# EAGLE board Sound_JQ6500_4_X9 (EAGLE 9.5.2), part 1 of 2
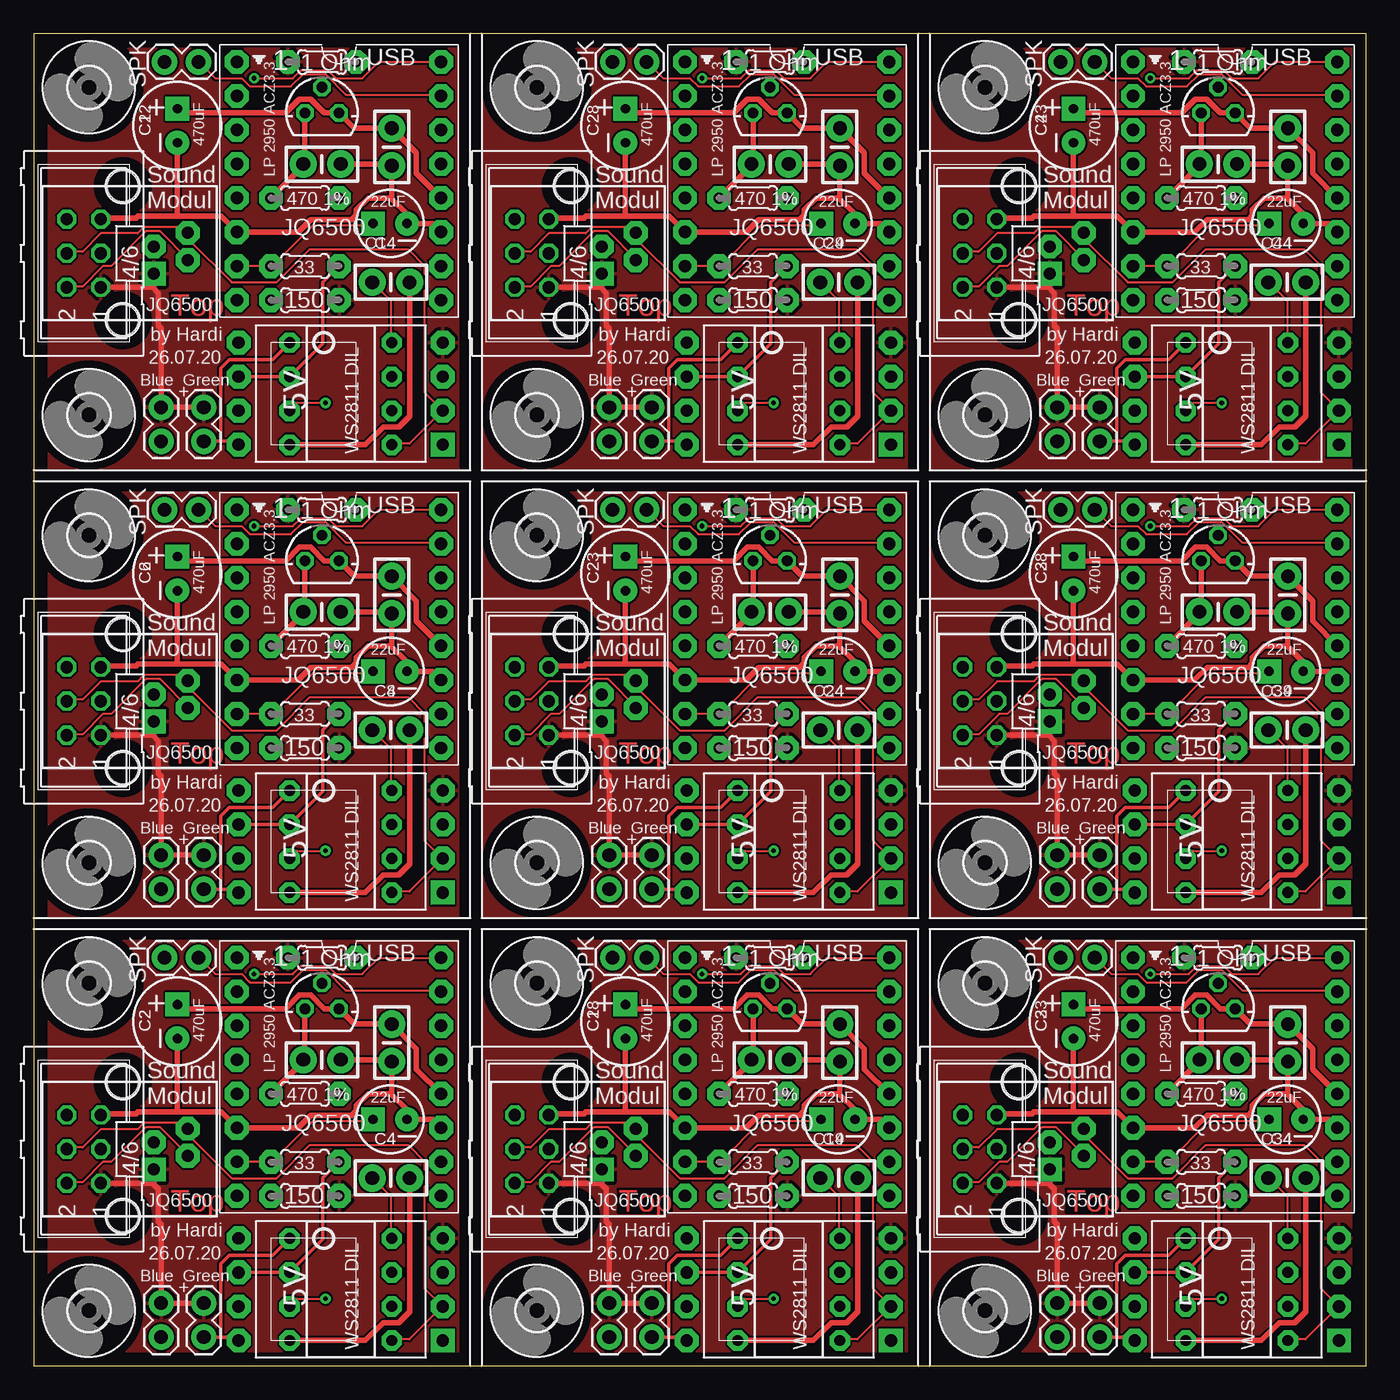
[diagram p0: board, top side]
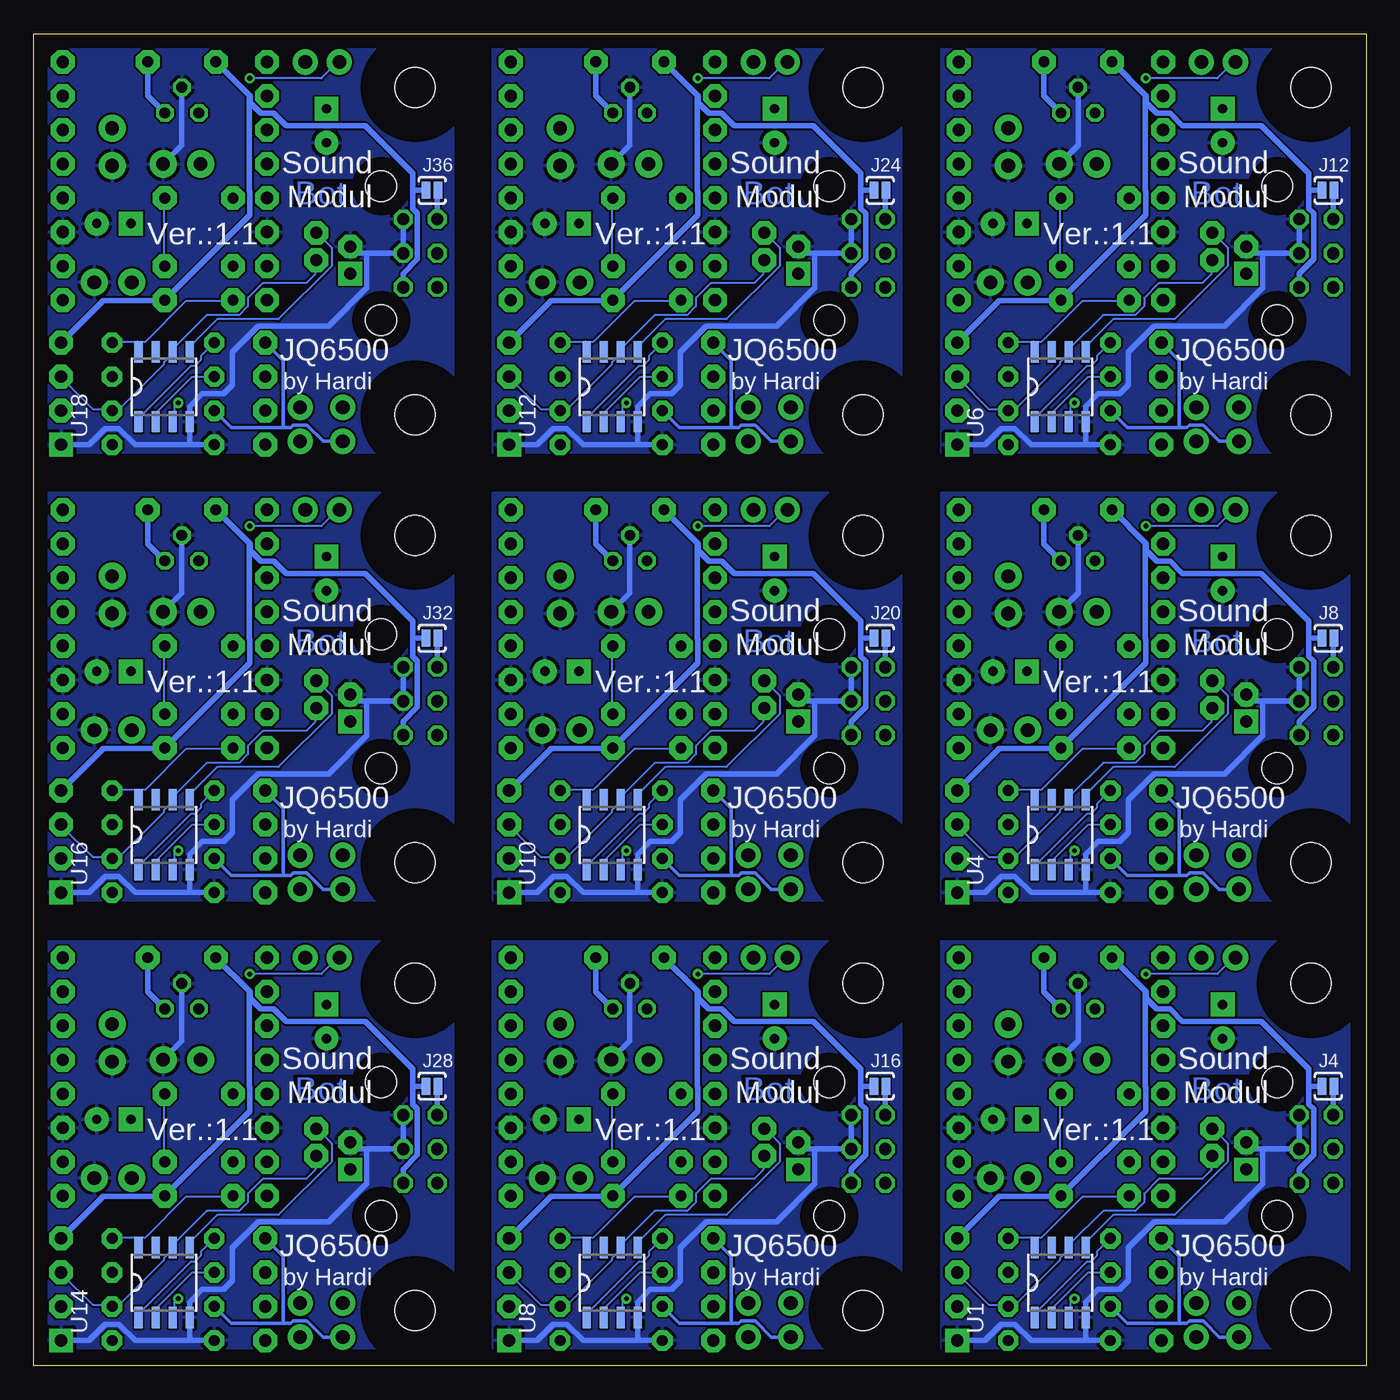
[diagram p1: board, bottom side, seen from below]

Size 99.47 x 99.47 mm. Coordinates in mm from the lower left corner, seen from the top.
Outline: 0,0 99.47,0
Outline: 0,32.6 0,0
Outline: 0,66.03 0,33.43
Outline: 99.47,99.47 0,99.47 0,0
Outline: 33.43,0 66.03,0
Outline: 66.03,99.47 33.43,99.47
Outline: 66.87,0 99.47,0
Outline: 99.47,0 99.47,32.6
Outline: 99.47,33.43 99.47,66.03
Outline: 99.47,0 99.47,99.47
Outline: 99.47,99.47 66.87,99.47
Copper layers (1*16): Top 0.035mm / dielectric 1.5mm / Bottom 0.035mm
Design rules "default": minimum track width 6mil, minimum drill 0.35mm, track to track 6mil, track to pad 6mil, pad to pad 6mil, via to via 6mil, smd to smd 6mil, copper to edge 40mil, drill to drill 6mil, minimum pad ring 10mil, minimum via ring 8mil, stop-mask expansion 4mil, vias tented up to drill 0mil, thermal gap 10mil

## Footprints (pad centres in the part's own frame; a part is rotated, then mirrored left to right if it is on the bottom)
CAP-PTH-SMALL-KIT = drill 1.016 pad 2.032: 1 -1.397,0; 2 1.397,0
SPARKFUN-CAPACITORS_CPOL-RADIAL-100UF-25V = drill 0.7 pad 1.778 square: 1 1.27,0 | drill 0.7 pad 1.778: 2 -1.27,0
CAPACITOR_CPOL-RADIAL-22UF = drill 0.7 pad 1.778 square: 1 1.27,0 | drill 0.7 pad 1.778: 2 -1.27,0
3,0 = hole 3: 0,0
78LXX = drill 0.813 octagon: GND 0,1.905; IN 1.27,0; OUT -1.27,0
1X02 = drill 1.016 pad 1.88: 1 0,0; 2 2.54,0
SJ_2S-NO = smd 0.635 x 1.27: 1 -0.45,0; 2 0.45,0
JQ6500 = drill 0.914 pad 1.778 octagon: 1 -8.89,16.51; 2 -8.89,13.97; 3 -8.89,11.43; 4 -8.89,8.89; 5 -8.89,6.35; 6 -8.89,3.81; 7 -8.89,1.27; 8 -8.89,-1.27; 9 6.35,-1.27; 10 6.35,1.27; 11 6.35,3.81; 12 6.35,6.35; 13 6.35,8.89; 14 6.35,11.43; 15 6.35,13.97; 16 6.35,16.51
RCL_0204/5 = drill 0.813 pad 1.778 octagon: 1 -2.54,0; 2 2.54,0
S3PO_MODUL_WS2811_SOUND_MP3-TF-16P_WS2811_AND_ATTINY_PUSHBUTTONACTION_4017_2_WS2811_WS2811_5V = drill 0.914 pad 1.778 square: 1 -5.08,-5.08 | drill 0.914 pad 1.778 octagon: 2 -2.54,-5.08; 3 0,-5.08; 4 2.54,-5.08; 5 2.54,10.16; 6 0,10.16; 7 -2.54,10.16; 8 -5.08,10.16
ML6 = drill 0.914 octagon: 1 -2.54,-1.27; 2 -2.54,1.27; 3 0,-1.27; 4 0,1.27; 5 2.54,-1.27; 6 2.54,1.27
SOP8 = smd 0.6 x 1.6: 1 -1.905,-2.6; 2 -0.635,-2.6; 3 0.635,-2.6; 4 1.905,-2.6; 5 1.905,2.6; 6 0.635,2.6; 7 -0.635,2.6; 8 -1.905,2.6
S3PO_MODUL_WS2811_SOUND_MP3-TF-16P_WS2811_AND_ATTINY_WS2811_DIP08 = drill 0.813 pad 1.524 octagon: 1 -3.81,-3.81; 2 -1.27,-3.81; 3 1.27,-3.81; 4 3.81,-3.81; 5 3.81,3.81; 6 1.27,3.81; 7 -1.27,3.81; 8 -3.81,3.81
RJ10 = drill 0.9 pad 1.778 square: 1 -1.524,-2.3 | drill 0.9 pad 1.778 octagon: 2 -0.508,-4.84; 3 0.508,-2.3; 4 1.524,-4.84 | hole 2.3: 5,0; -5,0

## Placement (x,y rotation side)
C1  0.1uF  [CAP-PTH-SMALL-KIT]  26.73,24.13 270 top
C2  470uF  [SPARKFUN-CAPACITORS_CPOL-RADIAL-100UF-25V]  10.73,25.72 90 top
C3  0.1uF  [CAP-PTH-SMALL-KIT]  26.73,57.56 270 top
C4  22uF  [CAPACITOR_CPOL-RADIAL-22UF]  26.61,18.42 180 top
C5  0.1uF  [CAP-PTH-SMALL-KIT]  26.67,47.47 0 top
C6  470uF  [SPARKFUN-CAPACITORS_CPOL-RADIAL-100UF-25V]  10.73,59.15 90 top
C7  0.1uF  [CAP-PTH-SMALL-KIT]  21.53,22.86 0 top
C8  22uF  [CAPACITOR_CPOL-RADIAL-22UF]  26.61,51.85 180 top
C9  0.1uF  [CAP-PTH-SMALL-KIT]  21.53,56.29 0 top
C10  0.1uF  [CAP-PTH-SMALL-KIT]  26.73,91 270 top
C11  0.1uF  [CAP-PTH-SMALL-KIT]  26.67,80.9 0 top
C12  470uF  [SPARKFUN-CAPACITORS_CPOL-RADIAL-100UF-25V]  10.73,92.58 90 top
C13  0.1uF  [CAP-PTH-SMALL-KIT]  26.67,14.03 0 top
C14  22uF  [CAPACITOR_CPOL-RADIAL-22UF]  26.61,85.28 180 top
C15  0.1uF  [CAP-PTH-SMALL-KIT]  21.53,89.73 0 top
C16  0.1uF  [CAP-PTH-SMALL-KIT]  60.17,24.13 270 top
C17  0.1uF  [CAP-PTH-SMALL-KIT]  60.1,14.03 0 top
C18  470uF  [SPARKFUN-CAPACITORS_CPOL-RADIAL-100UF-25V]  44.17,25.72 90 top
C19  22uF  [CAPACITOR_CPOL-RADIAL-22UF]  60.04,18.42 180 top
C20  0.1uF  [CAP-PTH-SMALL-KIT]  54.96,22.86 0 top
C21  0.1uF  [CAP-PTH-SMALL-KIT]  60.17,57.56 270 top
C22  0.1uF  [CAP-PTH-SMALL-KIT]  60.1,47.47 0 top
C23  470uF  [SPARKFUN-CAPACITORS_CPOL-RADIAL-100UF-25V]  44.17,59.15 90 top
C24  22uF  [CAPACITOR_CPOL-RADIAL-22UF]  60.04,51.85 180 top
C25  0.1uF  [CAP-PTH-SMALL-KIT]  54.96,56.29 0 top
C26  0.1uF  [CAP-PTH-SMALL-KIT]  60.17,91 270 top
C27  0.1uF  [CAP-PTH-SMALL-KIT]  60.1,80.9 0 top
C28  470uF  [SPARKFUN-CAPACITORS_CPOL-RADIAL-100UF-25V]  44.17,92.58 90 top
C29  22uF  [CAPACITOR_CPOL-RADIAL-22UF]  60.04,85.28 180 top
C30  0.1uF  [CAP-PTH-SMALL-KIT]  54.96,89.73 0 top
C31  0.1uF  [CAP-PTH-SMALL-KIT]  93.6,24.13 270 top
C32  0.1uF  [CAP-PTH-SMALL-KIT]  93.54,14.03 0 top
C33  470uF  [SPARKFUN-CAPACITORS_CPOL-RADIAL-100UF-25V]  77.6,25.72 90 top
C34  22uF  [CAPACITOR_CPOL-RADIAL-22UF]  93.47,18.42 180 top
C35  0.1uF  [CAP-PTH-SMALL-KIT]  88.39,22.86 0 top
C36  0.1uF  [CAP-PTH-SMALL-KIT]  93.6,57.56 270 top
C37  0.1uF  [CAP-PTH-SMALL-KIT]  93.54,47.47 0 top
C38  470uF  [SPARKFUN-CAPACITORS_CPOL-RADIAL-100UF-25V]  77.6,59.15 90 top
C39  22uF  [CAPACITOR_CPOL-RADIAL-22UF]  93.47,51.85 180 top
C40  0.1uF  [CAP-PTH-SMALL-KIT]  88.39,56.29 0 top
C41  0.1uF  [CAP-PTH-SMALL-KIT]  93.6,91 270 top
C42  0.1uF  [CAP-PTH-SMALL-KIT]  93.54,80.9 0 top
C43  470uF  [SPARKFUN-CAPACITORS_CPOL-RADIAL-100UF-25V]  77.6,92.58 90 top
C44  22uF  [CAPACITOR_CPOL-RADIAL-22UF]  93.47,85.28 180 top
C45  0.1uF  [CAP-PTH-SMALL-KIT]  88.39,89.73 0 top
H1  MOUNT-HOLE3.0  [3,0]  4.13,4.13 0 top
H2  MOUNT-HOLE3.0  [3,0]  4.13,62.01 0 top
H3  MOUNT-HOLE3.0  [3,0]  4.13,28.57 0 top
H4  MOUNT-HOLE3.0  [3,0]  4.13,37.56 0 top
H5  MOUNT-HOLE3.0  [3,0]  4.13,95.44 0 top
H6  MOUNT-HOLE3.0  [3,0]  4.13,70.99 0 top
H7  MOUNT-HOLE3.0  [3,0]  37.56,28.57 0 top
H8  MOUNT-HOLE3.0  [3,0]  37.56,4.13 0 top
H9  MOUNT-HOLE3.0  [3,0]  37.56,62.01 0 top
H10  MOUNT-HOLE3.0  [3,0]  37.56,37.56 0 top
H11  MOUNT-HOLE3.0  [3,0]  37.56,95.44 0 top
H12  MOUNT-HOLE3.0  [3,0]  37.56,70.99 0 top
H13  MOUNT-HOLE3.0  [3,0]  70.99,28.57 0 top
H14  MOUNT-HOLE3.0  [3,0]  70.99,4.13 0 top
H15  MOUNT-HOLE3.0  [3,0]  70.99,62.01 0 top
H16  MOUNT-HOLE3.0  [3,0]  70.99,37.56 0 top
H17  MOUNT-HOLE3.0  [3,0]  70.99,95.44 0 top
H18  MOUNT-HOLE3.0  [3,0]  70.99,70.99 0 top
IC1  LP 2950 ACZ3.3  [78LXX]  21.53,26.67 0 top
IC2  LP 2950 ACZ3.3  [78LXX]  21.53,60.1 0 top
IC3  LP 2950 ACZ3.3  [78LXX]  21.53,93.54 0 top
IC4  LP 2950 ACZ3.3  [78LXX]  54.96,26.67 0 top
IC5  LP 2950 ACZ3.3  [78LXX]  54.96,60.1 0 top
IC6  LP 2950 ACZ3.3  [78LXX]  54.96,93.54 0 top
IC7  LP 2950 ACZ3.3  [78LXX]  88.39,26.67 0 top
IC8  LP 2950 ACZ3.3  [78LXX]  88.39,60.1 0 top
IC9  LP 2950 ACZ3.3  [78LXX]  88.39,93.54 0 top
J1  SPK  [1X02]  12.32,30.48 180 top
J2  Green  [1X02]  12.7,4.7 270 top
J3  Blue  [1X02]  9.53,4.7 270 top
J4  SOLDERJUMPERNO  [SJ_2S-NO]  2.86,20.89 0 bottom
J5  SPK  [1X02]  12.32,63.91 180 top
J6  Green  [1X02]  12.7,38.13 270 top
J7  Blue  [1X02]  9.53,38.13 270 top
J8  SOLDERJUMPERNO  [SJ_2S-NO]  2.86,54.33 0 bottom
J9  SPK  [1X02]  12.32,97.35 180 top
J10  Green  [1X02]  12.7,71.57 270 top
J11  Blue  [1X02]  9.53,71.57 270 top
J12  SOLDERJUMPERNO  [SJ_2S-NO]  2.86,87.76 0 bottom
J13  SPK  [1X02]  45.75,30.48 180 top
J14  Green  [1X02]  46.13,4.7 270 top
J15  Blue  [1X02]  42.96,4.7 270 top
J16  SOLDERJUMPERNO  [SJ_2S-NO]  36.29,20.89 0 bottom
J17  SPK  [1X02]  45.75,63.91 180 top
J18  Green  [1X02]  46.13,38.13 270 top
J19  Blue  [1X02]  42.96,38.13 270 top
J20  SOLDERJUMPERNO  [SJ_2S-NO]  36.29,54.33 0 bottom
J21  SPK  [1X02]  45.75,97.35 180 top
J22  Green  [1X02]  46.13,71.57 270 top
J23  Blue  [1X02]  42.96,71.57 270 top
J24  SOLDERJUMPERNO  [SJ_2S-NO]  36.29,87.76 0 bottom
J25  SPK  [1X02]  79.19,30.48 180 top
J26  Green  [1X02]  79.57,4.7 270 top
J27  Blue  [1X02]  76.39,4.7 270 top
J28  SOLDERJUMPERNO  [SJ_2S-NO]  69.72,20.89 0 bottom
J29  SPK  [1X02]  79.19,63.91 180 top
J30  Green  [1X02]  79.57,38.13 270 top
J31  Blue  [1X02]  76.39,38.13 270 top
J32  SOLDERJUMPERNO  [SJ_2S-NO]  69.72,54.33 0 bottom
J33  SPK  [1X02]  79.19,97.35 180 top
J34  Green  [1X02]  79.57,71.57 270 top
J35  Blue  [1X02]  76.39,71.57 270 top
J36  SOLDERJUMPERNO  [SJ_2S-NO]  69.72,87.76 0 bottom
MOD1  [JQ6500]  24.07,13.97 0 top
MOD2  [JQ6500]  24.07,47.4 0 top
MOD3  [JQ6500]  24.07,80.84 0 top
MOD4  [JQ6500]  57.5,13.97 0 top
MOD5  [JQ6500]  57.5,47.4 0 top
MOD6  [JQ6500]  57.5,80.84 0 top
MOD7  [JQ6500]  90.93,13.97 0 top
MOD8  [JQ6500]  90.93,47.4 0 top
MOD9  [JQ6500]  90.93,80.84 0 top
R1  1 Ohm  [RCL_0204/5]  21.53,30.48 0 top
R2  150  [RCL_0204/5]  20.26,12.7 180 top
R3  470 1%  [RCL_0204/5]  20.26,20.32 0 top
R4  33  [RCL_0204/5]  20.26,15.24 180 top
R5  1 Ohm  [RCL_0204/5]  21.53,63.91 0 top
R6  150  [RCL_0204/5]  20.26,46.13 180 top
R7  470 1%  [RCL_0204/5]  20.26,53.75 0 top
R8  33  [RCL_0204/5]  20.26,48.67 180 top
R9  1 Ohm  [RCL_0204/5]  21.53,97.35 0 top
R10  150  [RCL_0204/5]  20.26,79.57 180 top
R11  470 1%  [RCL_0204/5]  20.26,87.19 0 top
R12  33  [RCL_0204/5]  20.26,82.11 180 top
R13  1 Ohm  [RCL_0204/5]  54.96,30.48 0 top
R14  150  [RCL_0204/5]  53.69,12.7 180 top
R15  470 1%  [RCL_0204/5]  53.69,20.32 0 top
R16  33  [RCL_0204/5]  53.69,15.24 180 top
R17  1 Ohm  [RCL_0204/5]  54.96,63.91 0 top
R18  150  [RCL_0204/5]  53.69,46.13 180 top
R19  470 1%  [RCL_0204/5]  53.69,53.75 0 top
R20  33  [RCL_0204/5]  53.69,48.67 180 top
R21  1 Ohm  [RCL_0204/5]  54.96,97.35 0 top
R22  150  [RCL_0204/5]  53.69,79.57 180 top
R23  470 1%  [RCL_0204/5]  53.69,87.19 0 top
R24  33  [RCL_0204/5]  53.69,82.11 180 top
R25  1 Ohm  [RCL_0204/5]  88.39,30.48 0 top
R26  150  [RCL_0204/5]  87.12,12.7 180 top
R27  470 1%  [RCL_0204/5]  87.12,20.32 0 top
R28  33  [RCL_0204/5]  87.12,15.24 180 top
R29  1 Ohm  [RCL_0204/5]  88.39,63.91 0 top
R30  150  [RCL_0204/5]  87.12,46.13 180 top
R31  470 1%  [RCL_0204/5]  87.12,53.75 0 top
R32  33  [RCL_0204/5]  87.12,48.67 180 top
R33  1 Ohm  [RCL_0204/5]  88.39,97.35 0 top
R34  150  [RCL_0204/5]  87.12,79.57 180 top
R35  470 1%  [RCL_0204/5]  87.12,87.19 0 top
R36  33  [RCL_0204/5]  87.12,82.11 180 top
SV1  [S3PO_MODUL_WS2811_SOUND_MP3-TF-16P_WS2811_AND_ATTINY_PUSHBUTTONACTION_4017_2_WS2811_WS2811_5V]  25.46,6.99 90 top
SV2  [ML6]  3.75,16.19 90 top
SV3  [S3PO_MODUL_WS2811_SOUND_MP3-TF-16P_WS2811_AND_ATTINY_PUSHBUTTONACTION_4017_2_WS2811_WS2811_5V]  25.46,40.42 90 top
SV4  [ML6]  3.75,49.63 90 top
SV5  [S3PO_MODUL_WS2811_SOUND_MP3-TF-16P_WS2811_AND_ATTINY_PUSHBUTTONACTION_4017_2_WS2811_WS2811_5V]  25.46,73.85 90 top
SV6  [ML6]  3.75,83.06 90 top
SV7  [S3PO_MODUL_WS2811_SOUND_MP3-TF-16P_WS2811_AND_ATTINY_PUSHBUTTONACTION_4017_2_WS2811_WS2811_5V]  58.9,6.99 90 top
SV8  [ML6]  37.18,16.19 90 top
SV9  [S3PO_MODUL_WS2811_SOUND_MP3-TF-16P_WS2811_AND_ATTINY_PUSHBUTTONACTION_4017_2_WS2811_WS2811_5V]  58.9,40.42 90 top
SV10  [ML6]  37.18,49.63 90 top
SV11  [S3PO_MODUL_WS2811_SOUND_MP3-TF-16P_WS2811_AND_ATTINY_PUSHBUTTONACTION_4017_2_WS2811_WS2811_5V]  58.9,73.85 90 top
SV12  [ML6]  37.18,83.06 90 top
SV13  [S3PO_MODUL_WS2811_SOUND_MP3-TF-16P_WS2811_AND_ATTINY_PUSHBUTTONACTION_4017_2_WS2811_WS2811_5V]  92.33,6.99 90 top
SV14  [ML6]  70.61,16.19 90 top
SV15  [S3PO_MODUL_WS2811_SOUND_MP3-TF-16P_WS2811_AND_ATTINY_PUSHBUTTONACTION_4017_2_WS2811_WS2811_5V]  92.33,40.42 90 top
SV16  [ML6]  70.61,49.63 90 top
SV17  [S3PO_MODUL_WS2811_SOUND_MP3-TF-16P_WS2811_AND_ATTINY_PUSHBUTTONACTION_4017_2_WS2811_WS2811_5V]  92.33,73.85 90 top
SV18  [ML6]  70.61,83.06 90 top
U1  WS2811 DIL  [SOP8]  22.86,6.23 0 bottom
U2  WS2811 DIL  [S3PO_MODUL_WS2811_SOUND_MP3-TF-16P_WS2811_AND_ATTINY_WS2811_DIP08]  22.92,5.71 270 top
U3  WS2811 DIL  [S3PO_MODUL_WS2811_SOUND_MP3-TF-16P_WS2811_AND_ATTINY_WS2811_DIP08]  22.92,39.15 270 top
U4  WS2811 DIL  [SOP8]  22.86,39.66 0 bottom
U5  WS2811 DIL  [S3PO_MODUL_WS2811_SOUND_MP3-TF-16P_WS2811_AND_ATTINY_WS2811_DIP08]  22.92,72.58 270 top
U6  WS2811 DIL  [SOP8]  22.86,73.1 0 bottom
U7  WS2811 DIL  [S3PO_MODUL_WS2811_SOUND_MP3-TF-16P_WS2811_AND_ATTINY_WS2811_DIP08]  56.36,5.71 270 top
U8  WS2811 DIL  [SOP8]  56.29,6.23 0 bottom
U9  WS2811 DIL  [S3PO_MODUL_WS2811_SOUND_MP3-TF-16P_WS2811_AND_ATTINY_WS2811_DIP08]  56.36,39.15 270 top
U10  WS2811 DIL  [SOP8]  56.29,39.66 0 bottom
U11  WS2811 DIL  [S3PO_MODUL_WS2811_SOUND_MP3-TF-16P_WS2811_AND_ATTINY_WS2811_DIP08]  56.36,72.58 270 top
U12  WS2811 DIL  [SOP8]  56.29,73.1 0 bottom
U13  WS2811 DIL  [S3PO_MODUL_WS2811_SOUND_MP3-TF-16P_WS2811_AND_ATTINY_WS2811_DIP08]  89.79,5.71 270 top
U14  WS2811 DIL  [SOP8]  89.73,6.23 0 bottom
U15  WS2811 DIL  [S3PO_MODUL_WS2811_SOUND_MP3-TF-16P_WS2811_AND_ATTINY_WS2811_DIP08]  89.79,39.15 270 top
U16  WS2811 DIL  [SOP8]  89.73,39.66 0 bottom
U17  WS2811 DIL  [S3PO_MODUL_WS2811_SOUND_MP3-TF-16P_WS2811_AND_ATTINY_WS2811_DIP08]  89.79,72.58 270 top
U18  WS2811 DIL  [SOP8]  89.73,73.1 0 bottom
X1  RJ10  [RJ10]  6.67,16.19 90 top
X2  RJ10  [RJ10]  6.67,49.63 90 top
X3  RJ10  [RJ10]  6.67,83.06 90 top
X4  RJ10  [RJ10]  40.1,16.19 90 top
X5  RJ10  [RJ10]  40.1,49.63 90 top
X6  RJ10  [RJ10]  40.1,83.06 90 top
X7  RJ10  [RJ10]  73.53,16.19 90 top
X8  RJ10  [RJ10]  73.53,49.63 90 top
X9  RJ10  [RJ10]  73.53,83.06 90 top

## Library data of the parts
C1 C3 C5 C7 C9-C11 C13 C15-C17 C20-C22 C25-C27 C30-C32 C35-C37 C40-C42 C45 = SparkFun-Capacitors; PROD_ID: CAP-08370
C2 C6 C12 C18 C23 C28 C33 C38 C43 = Sound_MP3-TF-16P_and_WS2811; PROD_ID: CAP-08439
C4 C8 C14 C19 C24 C29 C34 C39 C44 = Sound_MP3-TF-16P_WS2811_and_ATTiny; PROD_ID: CAP-08439
H1-H18 = holes
IC1-IC9 = v-reg-3
J1-J3 J5-J7 J9-J11 J13-J15 J17-J19 J21-J23 J25-J27 J29-J31 J33-J35 = SparkFun-Connectors
J4 J8 J12 J16 J20 J24 J28 J32 J36 = SparkFun-Retired
MOD1-MOD9 = Sound_JQ6500; OC_FARNELL: unknown; OC_NEWARK: unknown
R1-R36 = Sound_MP3-TF-16P_and_WS2811; SPICEPREFIX: R
SV1 SV3 SV5 SV7 SV9 SV11 SV13 SV15 SV17 U1 U4 U6 U8 U10 U12 U14 U16 U18 = S3PO_Modul_WS2811
SV2 SV4 SV6 SV8 SV10 SV12 SV14 SV16 SV18 = con-harting-ml; OC_FARNELL: unknown; OC_NEWARK: unknown
U2 U3 U5 U7 U9 U11 U13 U15 U17 = S3PO_Modul_WS2811; PROD_ID: IC-09439
X1-X9 = RJ10; OC_FARNELL: unknown; OC_NEWARK: unknown

## Nets
3V1: C9.1 IC2.OUT R7.1
3V2: C15.1 IC3.OUT R11.1
3V3: C7.1 IC1.OUT R3.1
3V4: C20.1 IC4.OUT R15.1
3V5: C25.1 IC5.OUT R19.1
3V6: C30.1 IC6.OUT R23.1
3V7: C35.1 IC7.OUT R27.1
3V8: C40.1 IC8.OUT R31.1
3V9: C45.1 IC9.OUT R35.1
+5V: J2.1 J3.1 J4.1 R1.1 R2.1 SV1.4 SV2.1 X1.1
+5V1: J6.1 J7.1 J8.1 R5.1 R6.1 SV3.4 SV4.1 X2.1
+5V2: J10.1 J11.1 J12.1 R9.1 R10.1 SV5.4 SV6.1 X3.1
+5V3: J14.1 J15.1 J16.1 R13.1 R14.1 SV7.4 SV8.1 X4.1
+5V4: J18.1 J19.1 J20.1 R17.1 R18.1 SV9.4 SV10.1 X5.1
+5V5: J22.1 J23.1 J24.1 R21.1 R22.1 SV11.4 SV12.1 X6.1
+5V6: J26.1 J27.1 J28.1 R25.1 R26.1 SV13.4 SV14.1 X7.1
+5V7: J30.1 J31.1 J32.1 R29.1 R30.1 SV15.4 SV16.1 X8.1
+5V8: J34.1 J35.1 J36.1 R33.1 R34.1 SV17.4 SV18.1 X9.1
B1: J7.2 SV3.5 U3.3 U4.3
B2: J3.2 SV1.5 U1.3 U2.3
B3: J11.2 SV5.5 U5.3 U6.3
B4: J15.2 SV7.5 U7.3 U8.3
B5: J19.2 SV9.5 U9.3 U10.3
B6: J23.2 SV11.5 U11.3 U12.3
B7: J27.2 SV13.5 U13.3 U14.3
B8: J31.2 SV15.5 U15.3 U16.3
B9: J35.2 SV17.5 U17.3 U18.3
DOUT: SV1.2 SV2.4 U1.5 U2.5 X1.4
DOUT1: SV3.2 SV4.4 U3.5 U4.5 X2.4
DOUT2: SV5.2 SV6.4 U5.5 U6.5 X3.4
DOUT3: SV7.2 SV8.4 U7.5 U8.5 X4.4
DOUT4: SV9.2 SV10.4 U9.5 U10.5 X5.4
DOUT5: SV11.2 SV12.4 U11.5 U12.5 X6.4
DOUT6: SV13.2 SV14.4 U13.5 U14.5 X7.4
DOUT7: SV15.2 SV16.4 U15.5 U16.5 X8.4
DOUT8: SV17.2 SV18.4 U17.5 U18.5 X9.4
G1: J6.2 SV3.8 U3.1 U4.1
G2: J2.2 SV1.8 U1.1 U2.1
G3: J10.2 SV5.8 U5.1 U6.1
G4: J14.2 SV7.8 U7.1 U8.1
G5: J18.2 SV9.8 U9.1 U10.1
G6: J22.2 SV11.8 U11.1 U12.1
G7: J26.2 SV13.8 U13.1 U14.1
G8: J30.2 SV15.8 U15.1 U16.1
G9: J34.2 SV17.8 U17.1 U18.1
GND: C1.2 C2.2 C4.2 C7.2 C13.2 IC1.GND MOD1.6 MOD1.11 SV1.1 SV2.3 SV2.5 U1.4 U2.4 X1.3
GND1: C3.2 C5.2 C6.2 C8.2 C9.2 IC2.GND MOD2.6 MOD2.11 SV3.1 SV4.3 SV4.5 U3.4 U4.4 X2.3
GND2: C10.2 C11.2 C12.2 C14.2 C15.2 IC3.GND MOD3.6 MOD3.11 SV5.1 SV6.3 SV6.5 U5.4 U6.4 X3.3
GND3: C16.2 C17.2 C18.2 C19.2 C20.2 IC4.GND MOD4.6 MOD4.11 SV7.1 SV8.3 SV8.5 U7.4 U8.4 X4.3
GND4: C21.2 C22.2 C23.2 C24.2 C25.2 IC5.GND MOD5.6 MOD5.11 SV9.1 SV10.3 SV10.5 U9.4 U10.4 X5.3
GND5: C26.2 C27.2 C28.2 C29.2 C30.2 IC6.GND MOD6.6 MOD6.11 SV11.1 SV12.3 SV12.5 U11.4 U12.4 X6.3
GND6: C31.2 C32.2 C33.2 C34.2 C35.2 IC7.GND MOD7.6 MOD7.11 SV13.1 SV14.3 SV14.5 U13.4 U14.4 X7.3
GND7: C36.2 C37.2 C38.2 C39.2 C40.2 IC8.GND MOD8.6 MOD8.11 SV15.1 SV16.3 SV16.5 U15.4 U16.4 X8.3
GND8: C41.2 C42.2 C43.2 C44.2 C45.2 IC9.GND MOD9.6 MOD9.11 SV17.1 SV18.3 SV18.5 U17.4 U18.4 X9.3
INPUT: SV1.3 SV2.2 U1.6 U2.6 X1.2
INPUT1: SV3.3 SV4.2 U3.6 U4.6 X2.2
INPUT2: SV5.3 SV6.2 U5.6 U6.6 X3.2
INPUT3: SV7.3 SV8.2 U7.6 U8.6 X4.2
INPUT4: SV9.3 SV10.2 U9.6 U10.6 X5.2
INPUT5: SV11.3 SV12.2 U11.6 U12.6 X6.2
INPUT6: SV13.3 SV14.2 U13.6 U14.6 X7.2
INPUT7: SV15.3 SV16.2 U15.6 U16.6 X8.2
INPUT8: SV17.3 SV18.2 U17.6 U18.6 X9.2
N$1: J1.1 MOD1.15
N$2: J1.2 MOD1.16
N$3: C1.1 C2.1 IC1.IN MOD1.12 R1.2
N$4: J4.2 SV2.6
N$5: C8.1 MOD2.7 R8.2
N$6: C3.1 C6.1 IC2.IN MOD2.12 R5.2
N$7: C4.1 MOD1.7 R4.2
N$8: J5.1 MOD2.15
N$9: J5.2 MOD2.16
N$10: J8.2 SV4.6
N$11: C14.1 MOD3.7 R12.2
N$12: C10.1 C12.1 IC3.IN MOD3.12 R9.2
N$13: J9.1 MOD3.15
N$14: J9.2 MOD3.16
N$15: J12.2 SV6.6
N$16: C19.1 MOD4.7 R16.2
N$17: C16.1 C18.1 IC4.IN MOD4.12 R13.2
N$18: J13.1 MOD4.15
N$19: J13.2 MOD4.16
N$20: J16.2 SV8.6
N$21: C24.1 MOD5.7 R20.2
N$22: C21.1 C23.1 IC5.IN MOD5.12 R17.2
N$23: J17.1 MOD5.15
N$24: J17.2 MOD5.16
N$25: J20.2 SV10.6
N$26: C29.1 MOD6.7 R24.2
N$27: C26.1 C28.1 IC6.IN MOD6.12 R21.2
N$28: J21.1 MOD6.15
N$29: J21.2 MOD6.16
N$30: J24.2 SV12.6
N$31: C34.1 MOD7.7 R28.2
N$32: C31.1 C33.1 IC7.IN MOD7.12 R25.2
N$33: J25.1 MOD7.15
N$34: J25.2 MOD7.16
N$35: J28.2 SV14.6
N$36: C39.1 MOD8.7 R32.2
N$37: C36.1 C38.1 IC8.IN MOD8.12 R29.2
N$38: J29.1 MOD8.15
N$39: J29.2 MOD8.16
N$40: J32.2 SV16.6
N$41: C44.1 MOD9.7 R36.2
N$42: C41.1 C43.1 IC9.IN MOD9.12 R33.2
N$43: J33.1 MOD9.15
N$44: J33.2 MOD9.16
N$45: J36.2 SV18.6
PWR1: C5.1 R6.2 U3.8 U4.8
PWR2: C13.1 R2.2 U1.8 U2.8
PWR3: C11.1 R10.2 U5.8 U6.8
PWR4: C17.1 R14.2 U7.8 U8.8
PWR5: C22.1 R18.2 U9.8 U10.8
PWR6: C27.1 R22.2 U11.8 U12.8
PWR7: C32.1 R26.2 U13.8 U14.8
PWR8: C37.1 R30.2 U15.8 U16.8
PWR9: C42.1 R34.2 U17.8 U18.8
R1: R3.2 R4.1 SV1.6 U1.2 U2.2
R2: R7.2 R8.1 SV3.6 U3.2 U4.2
R3: R11.2 R12.1 SV5.6 U5.2 U6.2
R4: R15.2 R16.1 SV7.6 U7.2 U8.2
R5: R19.2 R20.1 SV9.6 U9.2 U10.2
R6: R23.2 R24.1 SV11.6 U11.2 U12.2
R7: R27.2 R28.1 SV13.6 U13.2 U14.2
R8: R31.2 R32.1 SV15.6 U15.2 U16.2
R9: R35.2 R36.1 SV17.6 U17.2 U18.2